# EAGLE board followLineMain (EAGLE 7.7.0)
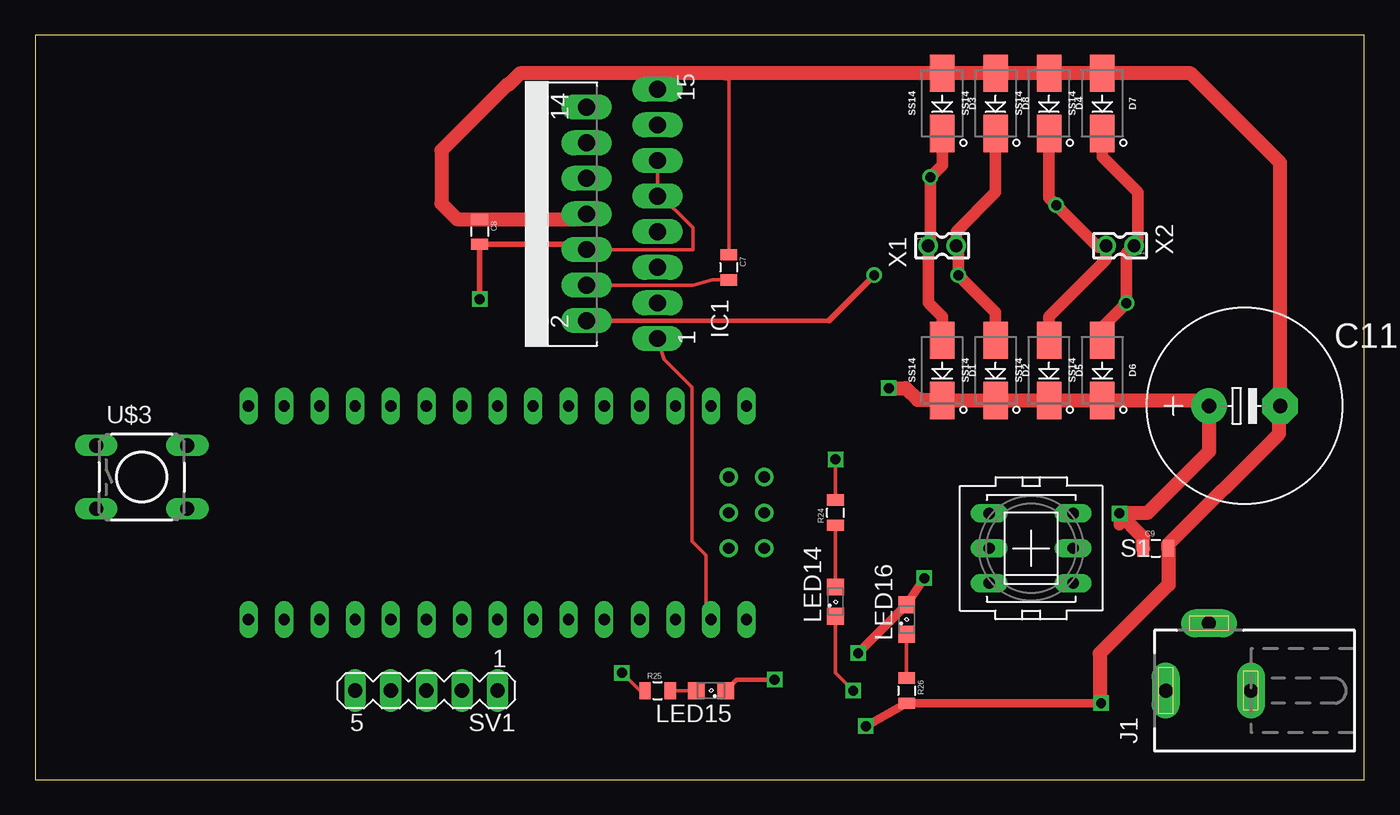
[diagram p0: board, top side]
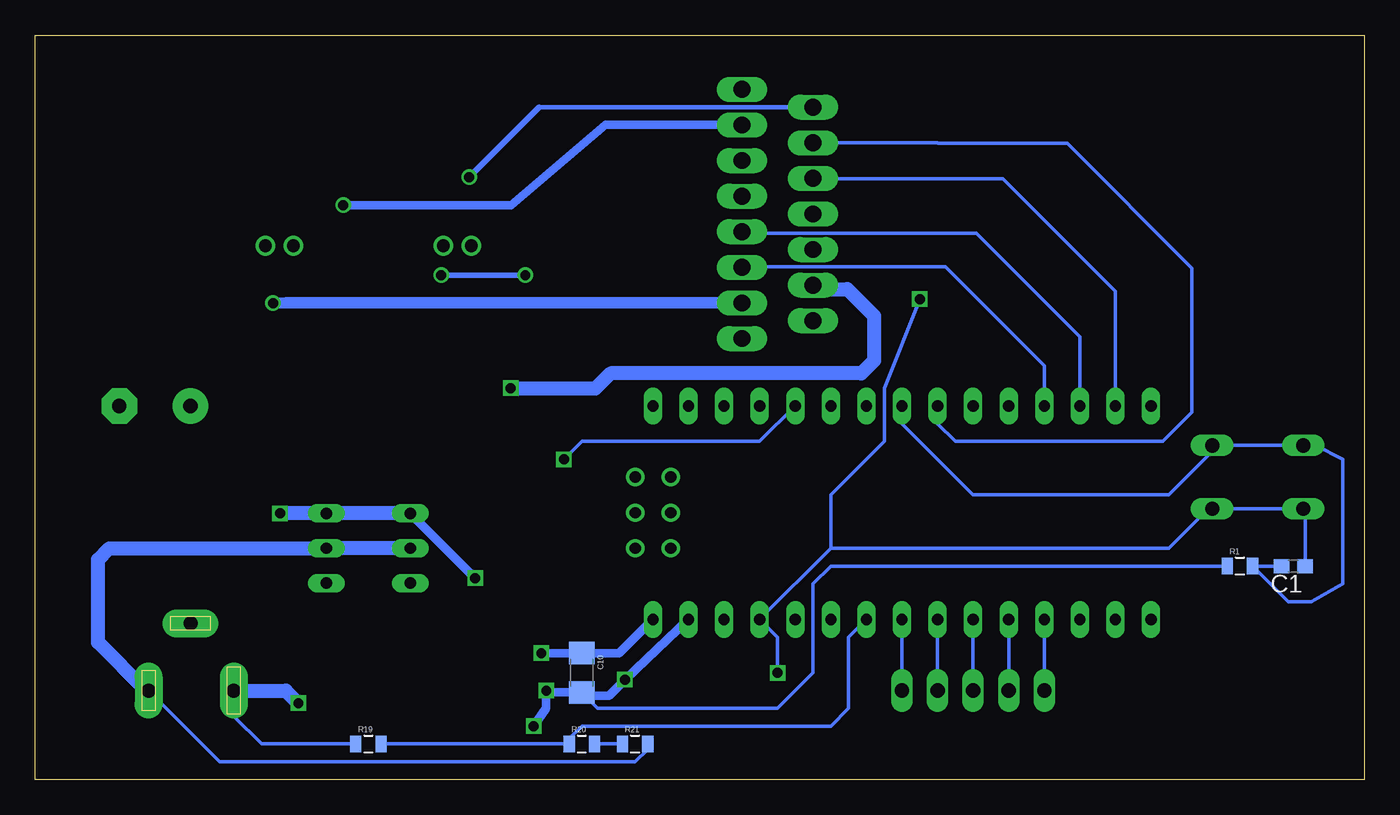
[diagram p1: board, bottom side, seen from below]

Size 94.92 x 53.14 mm. Coordinates in mm from the lower left corner, seen from the top.
Outline: 0,0 94.92,0 94.92,53.14 0,53.14 0,0
Copper layers (1*16): Top 0.035mm / dielectric 1.5mm / Bottom 0.035mm
Design rules "default": minimum track width 10mil, minimum drill 24mil, track to track 8mil, track to pad 8mil, pad to pad 8mil, via to via 8mil, smd to smd 8mil, copper to edge 40mil, drill to drill 8mil, minimum pad ring 10mil, minimum via ring 8mil, stop-mask expansion 4mil, vias tented up to drill 0mil, thermal gap 10mil

## Footprints (pad centres in the part's own frame; a part is rotated, then mirrored left to right if it is on the bottom)
C0603 = smd 1.1 x 1: 1 -0.85,0; 2 0.85,0
0805 = smd 0.8 x 1.2: 1 -0.9,0; 2 0.9,0
1206 = smd 1.6 x 1.8: 1 -1.4,0; 2 1.4,0
E5-13 = drill 1.016 pad 2.54: + -2.54,0 | drill 1.016 pad 2.54 octagon: - 2.54,0
DO214 = smd 2.65 x 1.75: ANODE -2.15,0; CATHODE 2.15,0
MULTIWATT-15 = drill 1.2 long: 1 -8.89,-7.62; 2 -7.62,-2.54; 3 -6.35,-7.62; 4 -5.08,-2.54; 5 -3.81,-7.62; 6 -2.54,-2.54; 7 -1.27,-7.62; 8 0,-2.54; 9 1.27,-7.62; 10 2.54,-2.54; 11 3.81,-7.62; 12 5.08,-2.54; 13 6.35,-7.62; 14 7.62,-2.54; 15 8.89,-7.62
DCJ0202 = drill 1 pad 2 long: 1 0,3.1; 2 4.8,0; 3 0,-3
SML0805 = smd 1.2 x 1.2: A 1.05,0; C -1.05,0
PVA2R = drill 0.813 long: 1 -2.997,2.489; 2 -2.997,0; 3 -2.997,-2.489; 4 2.997,2.489; 5 2.997,0; 6 2.997,-2.489
MA05-1 = drill 1.016 long: 1 -5.08,0; 2 -2.54,0; 3 0,0; 4 2.54,0; 5 5.08,0
NANO = drill 0.8 long: 3.3V -10.16,24.13; 5V -10.16,-1.27; A0 -10.16,19.05; A1 -10.16,16.51; A2 -10.16,13.97; A3 -10.16,11.43; A4 -10.16,8.89; A5 -10.16,6.35; A6 -10.16,3.81; A7 -10.16,1.27; AREF -10.16,21.59; D2 5.08,1.27; D3 5.08,3.81; D4 5.08,6.35; D5 5.08,8.89; D6 5.08,11.43; D7 5.08,13.97; D8 5.08,16.51; D9 5.08,19.05; D10 5.08,21.59; D11 5.08,24.13; D12 5.08,26.67; D13 -10.16,26.67; GND -10.16,-6.35; GND1 5.08,-1.27; RAW -10.16,-8.89; RST -10.16,-3.81; RST1 5.08,-3.81; RX1 5.08,-6.35; TX0 5.08,-8.89 | drill 0.8: ICSP1 -5.08,-10.16; ICSP2 -5.08,-7.62; ICSP3 -2.54,-10.16; ICSP4 -2.54,-7.62; ICSP5 0,-10.16; ICSP6 0,-7.62
TAC-SWITCH-PTH = drill 1.016 pad 1.524 long: 1 -3.251,2.261; 2 3.251,2.261; 3 -3.251,-2.261; 4 3.251,-2.261
332-02 = drill 0.9 pad 1.27: 1 0,-1; 2 0,1

## Placement (x,y rotation side)
C1  100nF  [C0603]  5.08,15.24 180 bottom
C7  100nF  [0805]  49.53,36.56 270 top
C8  100nF  [0805]  31.75,39.1 270 top
C9  100nF  [0805]  80.01,16.51 0 top
C10  1uF  [1206]  55.88,7.62 270 bottom
C11  330uF  [E5-13]  86.36,26.67 0 top
D1  SS14  [DO214]  64.77,29.21 270 top
D2  SS14  [DO214]  68.58,29.21 270 top
D3  SS14  [DO214]  64.77,48.26 270 top
D4  SS14  [DO214]  72.39,48.26 270 top
D5  SS14  [DO214]  72.39,29.21 270 top
D6  SS14  [DO214]  76.2,29.21 270 top
D7  SS14  [DO214]  76.2,48.26 270 top
D8  SS14  [DO214]  68.58,48.26 270 top
IC1  L298  [MULTIWATT-15]  36.83,40.37 90 top
J1  DCJ0202  [DCJ0202]  83.82,6.35 90 top
LED14  red  [SML0805]  57.15,12.7 90 top
LED15  green  [SML0805]  48.26,6.35 180 top
LED16  green  [SML0805]  62.23,11.43 90 top
R1  10K  [0805]  8.89,15.24 0 bottom
R19  100K  [0805]  71.12,2.54 0 bottom
R20  100K  [0805]  55.88,2.54 0 bottom
R21  100K  [0805]  52.07,2.54 0 bottom
R24  510  [0805]  57.15,19.05 90 top
R25  510  [0805]  44.45,6.35 0 top
R26  820  [0805]  62.23,6.35 270 top
S1  PVA2R  [PVA2R]  71.12,16.51 0 top
SV1  [MA05-1]  27.94,6.35 180 top
U$1  NANO  [NANO]  41.91,21.59 90 top
U$3  TACTILE-SWITCH-PTH  [TAC-SWITCH-PTH]  7.62,21.59 0 top
X1  332-02  [332-02]  64.77,38.1 270 top
X2  332-02  [332-02]  77.47,38.1 90 top

## Library data of the parts
C1 = eagle-ltspice; SPICEMODEL: NONE; SPICEPREFIX: C
C7-C10 = SparkFun-Capacitors
C11 = rcl
D1-D8 = ihpcb-diode
IC1 = st-microelectronics; MPN: L298N; OC_FARNELL: 1589425; OC_NEWARK: 32M1527
J1 = con-jack; OC_FARNELL: unknown; OC_NEWARK: unknown
LED14-LED16 = led
R1 R19-R21 R24-R26 = SparkFun-Passives
S1 = switch-misc
SV1 = con-lstb; OC_FARNELL: unknown; OC_NEWARK: unknown
U$1 = Arduino-clone
U$3 = GeekAmmo
X1 X2 = con-garry

## Nets
5V: C1.1 C8.2 IC1.6 IC1.9 IC1.11 R25.1 U$1.5V U$3.3 U$3.4
A5: R19.2 R20.1 U$1.A5
COUNT: C1.2 R1.2 U$1.D5 U$3.1 U$3.2
GND: C7.1 C8.1 C9.2 C10.2 C11.- D3.ANODE D4.ANODE D7.ANODE D8.ANODE IC1.1 IC1.8 IC1.15 J1.1 LED14.C LED15.C R1.1 R19.1 R26.2 U$1.GND
LOWBAT: R24.2 U$1.D2
N$1: LED16.C R26.1
N$2: LED14.A R24.1
N$3: SV1.1 U$1.A4
N$4: SV1.2 U$1.A3
N$5: R20.2 R21.1
N$6: SV1.3 U$1.A2
N$7: SV1.4 U$1.A1
N$8: SV1.5 U$1.A0
N$9: LED15.A R25.2
OUT1: D2.ANODE D8.CATHODE IC1.2 X1.2
OUT2: D6.ANODE D7.CATHODE IC1.3 X2.1
OUT3: D4.CATHODE D5.ANODE IC1.13 X2.2
OUT4: D1.ANODE D3.CATHODE IC1.14 X1.1
PWM1: IC1.5 U$1.D9
PWM2: IC1.7 U$1.D10
PWM3: IC1.10 U$1.D11
PWM4: IC1.12 U$1.D6
VBAT: C7.2 C9.1 C10.1 C11.+ D1.CATHODE D2.CATHODE D5.CATHODE D6.CATHODE IC1.4 LED16.A S1.1 S1.4 U$1.RAW
VIN: J1.3 R21.2 S1.2 S1.5

## Tracks (layer width: path | path; a pad name or v marks a point on that pad's centre or on a via)
5V  (via drill 0.7)
  Top 0.254: v41.91,7.62 43.18,6.35 R25.1 | IC1.6 46.99,37.83 46.99,39.37 45.72,40.64 IC1.9 IC1.11
  Top 0.406: v31.75,34.29 C8.2 39,38.2 IC1.6
  Bottom 0.254: C1.1 4.23,19.19 U$3.3 U$3.4 11.15,19.33 13.97,16.51 38.1,16.51 | v41.91,7.62 41.91,10.16 U$1.5V 38.1,16.51 | 38.1,16.51 38.1,20.32 34.29,24.13 34.29,27.94 v31.75,34.29
A5
  Bottom 0.254: R19.2 R20.1 56.78,2.91 55.88,3.81 38.1,3.81 36.83,5.08 36.83,10.16 U$1.A5
COUNT
  Bottom 0.254: C1.2 R1.2 5.45,12.7 3.81,12.7 1.54,13.97 1.54,22.86 3.53,23.85 U$3.1 U$3.2 10.87,23.42 13.97,20.32 27.94,20.32 33.02,25.4 U$1.D5
GND  (via drill 0.7)
  Top 0.254: LED14.C 57.15,7.62 v58.42,6.35 | C8.1 38,40 IC1.8 | IC1.1 44.92,30 46.92,28 46.92,17 47.92,16 47.92,12 U$1.GND | C7.1 49.53,50.2 49.32,50.41
  Top 0.305: v52.8,7.13 50.09,7.13 LED15.C
  Top 0.61: v59.32,3.81 R26.2 v76.12,5.45 | 49.53,6.13 LED15.C
  Top 0.813: IC1.15 44.45,49.47 | C9.2 | 75.92,5.65 v76.12,5.45
  Top 1.016: C9.2 80.91,16.79 88.82,24.7 88.82,26.59 C11.- 88.9,44.02 82.52,50.4 D7.ANODE D4.ANODE D8.ANODE D3.ANODE 49.32,50.41 45.6,50.41 | C9.2 80.92,13.9 76.02,9 76.02,5.55 v76.12,5.45 | 45.6,50.41 IC1.15 | 45.6,50.41 34.63,50.41 33.82,49.6 33.72,49.6 29.02,44.9 29.02,41.1 30.12,40 39,40 IC1.8
  Bottom 0.254: J1.1 80.72,4.52 78.74,2.54 R19.1 | R1.1 38.1,15.24 39.37,13.97 39.37,7.62 41.91,5.08 54.74,5.08 C10.2
  Bottom 0.61: v59.32,3.81 58.42,5.08 v58.42,6.35 58.29,6.22 C10.2 55.66,6 53.92,6 v52.8,7.12 v52.8,7.13 U$1.GND
  Bottom 1.016: J1.1 77.02,6.35 v76.12,5.45
LOWBAT  (via drill 0.7)
  Top 0.254: R24.2 v57.15,22.86
  Bottom 0.254: v57.15,22.86 55.88,24.13 43.18,24.13 U$1.D2
N$1
  Top 0.254: LED16.C R26.1
N$2
  Top 0.254: LED14.A R24.1
N$3
  Bottom 0.254: SV1.1 U$1.A4
N$4
  Bottom 0.254: SV1.2 U$1.A3
N$5
  Bottom 0.254: R20.2 R21.1
N$6
  Bottom 0.254: SV1.3 U$1.A2
N$7
  Bottom 0.254: SV1.4 U$1.A1
N$8
  Bottom 0.254: SV1.5 U$1.A0
N$9
  Top 0.254: LED15.A R25.2
OUT1  (via drill 0.7)
  Top 0.305: IC1.2 56.67,32.75
  Top 0.406: 56.67,32.75 v59.92,36
  Top 0.813: D8.CATHODE 68.58,41.91 65.77,39.1 X1.2 65.92,37.95 v65.92,36 68.58,33.34 D2.ANODE
  Bottom 0.406: v59.92,36 v65.92,36
OUT2  (via drill 0.7)
  Top 0.813: D7.CATHODE 76.2,44.45 78.74,41.91 78.74,38.37 X2.1 77.92,37.55 v77.92,34 76.2,32.28 D6.ANODE
  Bottom 0.813: IC1.3 76.94,34.02 v77.92,34
OUT3  (via drill 0.7)
  Top 0.813: D5.ANODE 72.39,33.02 76.47,37.1 X2.2 76.37,38 75.92,38 v72.92,41 72.39,41.53 D4.CATHODE
  Bottom 0.61: IC1.13 54.2,46.72 60.92,41 v72.92,41
OUT4  (via drill 0.7)
  Top 0.813: 64.77,30.48 D1.ANODE 64.77,33.02 63.77,34.02 X1.1 63.92,38.25 v63.92,43 64.77,43.85 D3.CATHODE
  Bottom 0.305: IC1.14 58.93,47.99
  Bottom 0.406: 58.93,47.99 v63.92,43
PWM1
  Bottom 0.254: U$1.D9 22.86,29.54 29.92,36.6 44.41,36.6 IC1.5
PWM2
  Bottom 0.254: U$1.D10 20.32,31.6 27.72,39 44.35,39 IC1.7
PWM3
  Bottom 0.254: U$1.D11 17.78,34.86 25.82,42.9 IC1.10
PWM4
  Bottom 0.254: U$1.D6 30.48,25.4 29.21,24.13 14.39,24.13 12.32,26.2 12.32,36.5 21.22,45.4 30.47,45.4 30.52,45.45 | 30.48,45.45 30.52,45.45 | 30.52,45.45 IC1.12
VBAT  (via drill 0.7)
  Top 0.254: C7.2 48.36,35.66 46.99,35.29 IC1.4
  Top 0.61: v58.77,9.02 LED16.A v63.5,14.38
  Top 0.813: 77.42,18.2 v77.42,19 77.47,19.05
  Top 1.016: C9.1 79.11,17.31 v77.42,19 | 77.47,19.05 79.47,19.05 83.82,23.4 C11.+ 83.43,27.06 D6.CATHODE D5.CATHODE D2.CATHODE D1.CATHODE 64.73,27.1 63.02,27.1 62.18,27.94 v60.96,27.94
  Bottom 0.61: U$1.RAW 53.21,9.02 C10.1 v58.77,9.02 | v63.5,14.38 S1.1
  Bottom 0.813: v77.42,19 77.47,19.05 | 39.08,35 IC1.4
  Bottom 1.016: S1.1 S1.4 v77.42,19 | 39.08,35 36.92,35 35.02,33.1 35.02,29.9 35.92,29 53.82,29 54.92,27.9 60.92,27.9 v60.96,27.94
VIN
  Bottom 0.254: R21.2 51.17,2.17 52.07,1.27 81.74,1.27 J1.3
  Bottom 1.016: S1.2 S1.5 89.62,16.5 90.42,15.7 90.42,9.8 86.97,6.35 J1.3